# Altium PCB Parallel_CS.PcbDoc (part 3 of 3)
Units mm, origin at the board's own origin, x right, y up, seen from the top; angles counter-clockwise.
Board outline 81.03 x 171.07 mm, 4 copper layers (Top Layer, Ground Plane, Power Plane, Bottom Layer), stack 0.778 mm thick; 393 components, 189 nets, 1068 pads, 234 vias.
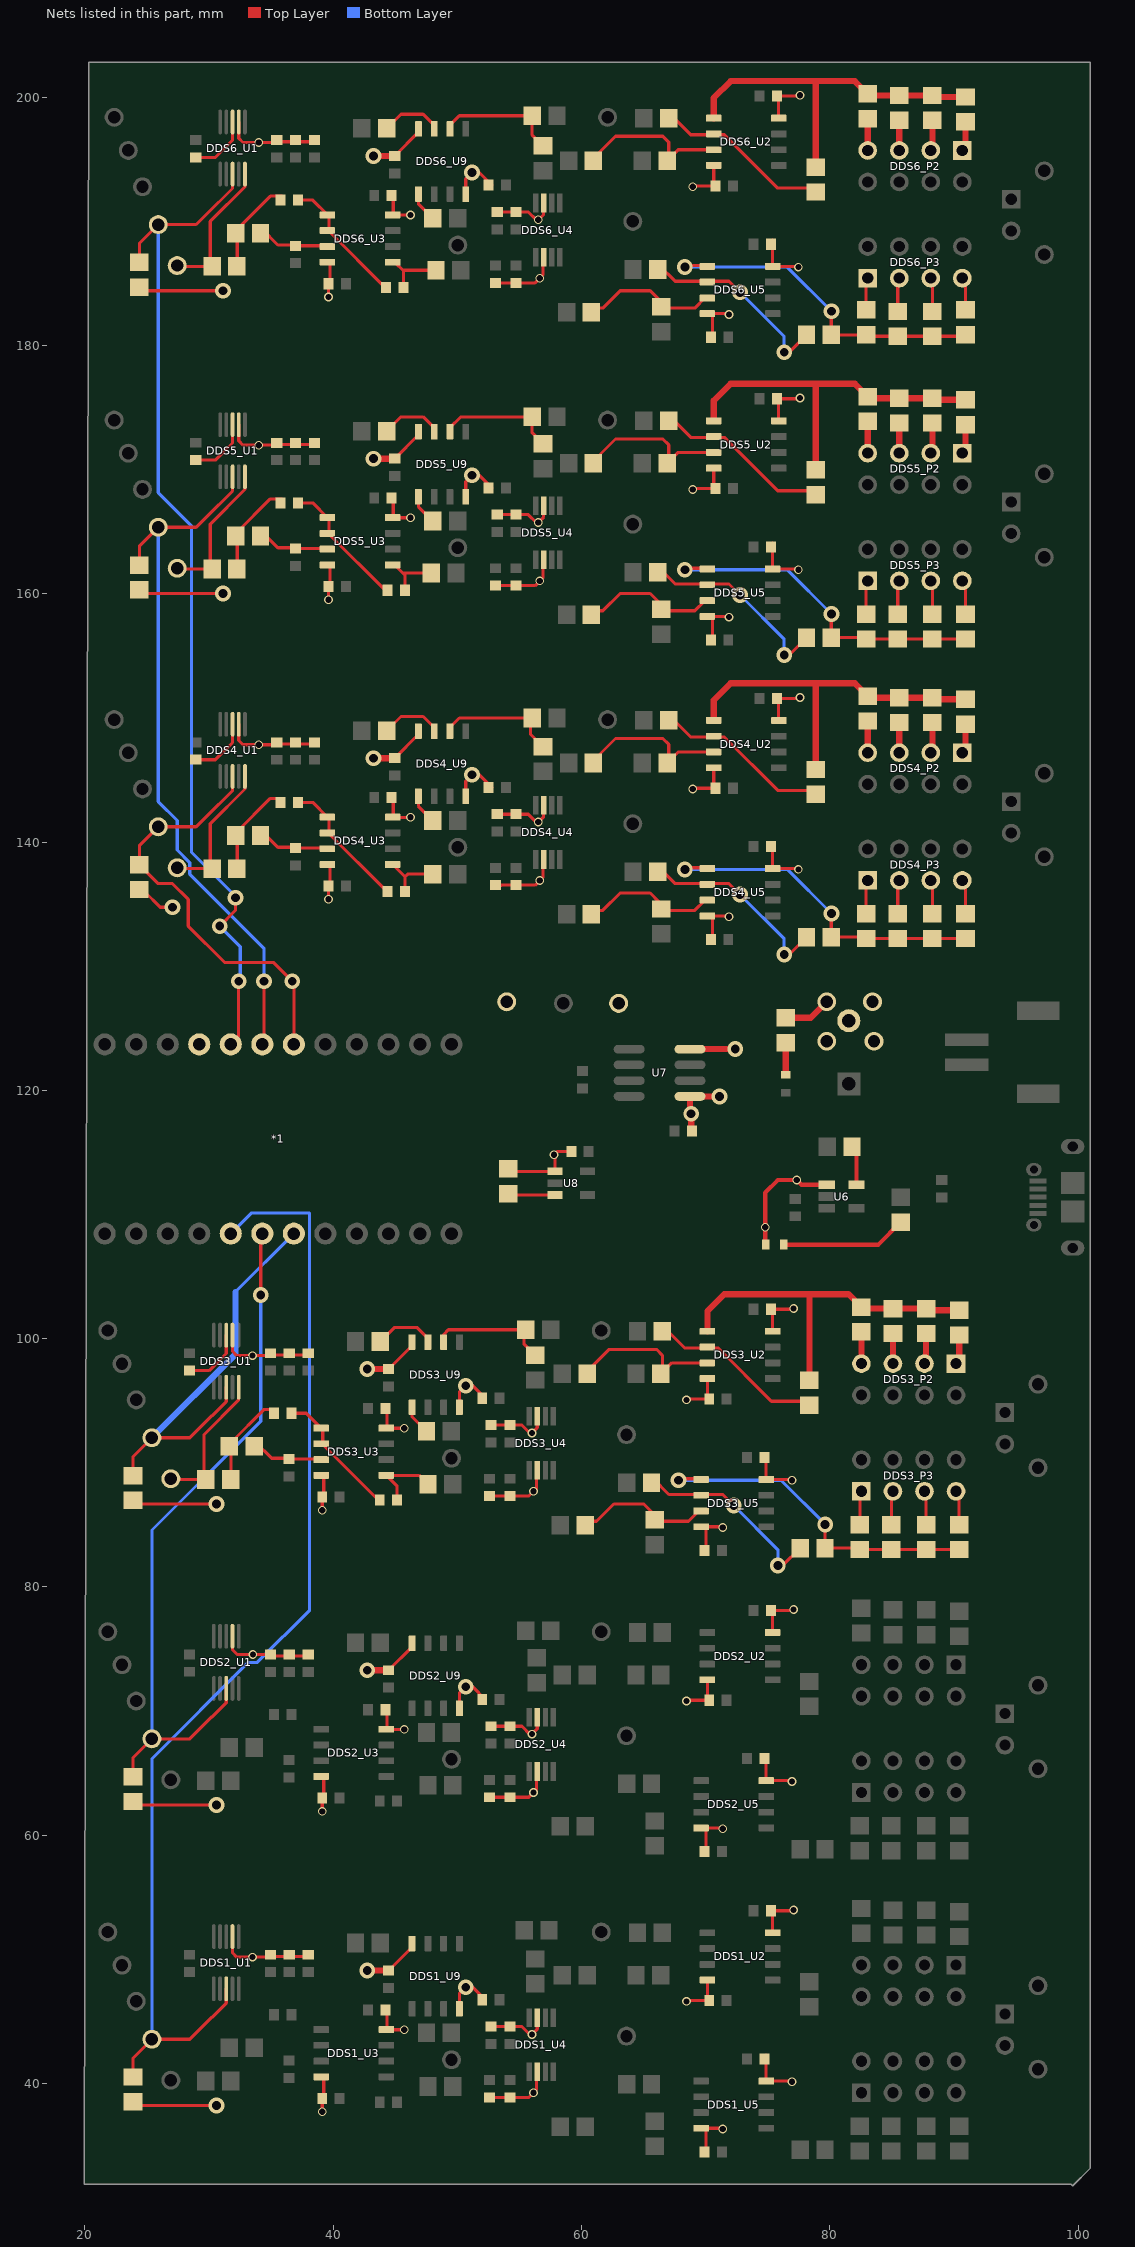
[diagram p5: the nets of this part, all layers, seen from the top]

## Via types
v1: diameter 0.7, hole 0.5, Top Layer to Bottom Layer, 143 vias
v2: diameter 1.27, hole 0.711, Top Layer to Bottom Layer, 76 vias
v3: diameter 1.27, hole 0.711, Top Layer to Bottom Layer, tented both sides, 9 vias
v4: diameter 1.5, hole 1, Top Layer to Bottom Layer, 6 vias

## Nets (pads, with @x,y where several pads share a name; then routed paths per layer and width w, separated by ;. In a path a pad name is that pad's centre, name@x,y a point inside that pad or via, vN(x,y) a via of type N, cw(c..) or ccw(c..) an arc to the next point about the centre after c; other vN are vias at no path point) (continued)
NetDDS3_C1_2: DDS3_C1.2 DDS3_R5.2 DDS3_U3.3 | length 5.7
  Top Layer w0.254: DDS3_R5.2@33.766,91.632 35.036,90.362 DDS3_C1.2@36.319,90.362 ; DDS3_C1.2@36.449,90.3 38.982,90.3 DDS3_U3.3@39.031,90.251
NetDDS3_C2_1: DDS3_C2.1 DDS3_C3.1 DDS3_U3.1 DDS3_U3.2 | length 10.6
  Top Layer w0.254: DDS3_C3.1@36.641,93.98 37.842,93.98 DDS3_U3.1@39.031,92.791 ; DDS3_U3.1@39.158,92.775 39.158,91.463 DDS3_C2.1@43.688,86.933
NetDDS3_C2_2: DDS3_C2.2 DDS3_R6.2 DDS3_U3.5 | length 6
  Top Layer w0.254: DDS3_C2.2@45.15,86.995 45.15,88.112 DDS3_U3.5@44.281,88.981 46.925,88.981 DDS3_R6.2@47.641,88.265
NetDDS3_C3_2: DDS3_C3.2 DDS3_R4.2 DDS3_R5.1 | length 7.4
  Top Layer w0.254: DDS3_R4.2@31.861,88.965 31.766,89.06 31.766,91.632 34.433,94.299 DDS3_C3.2@35.368,94.299
NetDDS3_C4_2: DDS3_C4.2 DDS3_U1.3 | length 5
  Top Layer w0.254: DDS3_C4.2@28.418,97.418 30.004,97.418 31.385,98.799 DDS3_U1.3@31.385,100.277
NetDDS3_P2_1: DDS3_P2.1 DDS3_R19.2 | length 2.4
  Top Layer w0.5: DDS3_P2.1@90.17,97.982 90.424,98.236 DDS3_R19.2@90.424,100.284
NetDDS3_P2_3: DDS3_P2.3 DDS3_R18.2 | length 2.5
  Top Layer w0.5: DDS3_P2.3@87.63,97.982 87.757,98.109 DDS3_R18.2@87.757,100.411
NetDDS3_P2_5: DDS3_P2.5 DDS3_R11.2 | length 2.5
  Top Layer w0.5: DDS3_P2.5@85.09,97.982 84.963,98.109 85.09,98.236 DDS3_R11.2@85.09,100.411
NetDDS3_P2_7: DDS3_P2.7 DDS3_R3.1 | length 2.4
  Top Layer w0.5: DDS3_P2.7@82.36,98.172 82.55,98.363 DDS3_R3.1@82.55,100.538
NetDDS3_P3_1: DDS3_P3.1 DDS3_R23.1 | length 2.7
  Top Layer w0.254: DDS3_R23.1@82.423,85.012 82.423,87.568 DDS3_P3.1@82.55,87.695
NetDDS3_P3_3: DDS3_P3.3 DDS3_R22.2 | length 2.7
  Top Layer w0.254: DDS3_R22.2@84.963,85.012 DDS3_P3.3@84.963,87.568
  Top Layer w0.5: DDS3_P3.3@84.963,87.568 DDS3_P3.3@85.09,87.695
NetDDS3_P3_5: DDS3_P3.5 DDS3_R21.2 | length 2.7
  Top Layer w0.254: DDS3_P3.5@87.63,87.695 87.757,87.568 DDS3_R21.2@87.757,85.012
NetDDS3_P3_7: DDS3_P3.7 DDS3_R20.2 | length 2.8
  Top Layer w0.254: DDS3_P3.7@90.17,87.695 90.424,87.441 DDS3_R20.2@90.424,85.012
NetDDS3_R1_2: DDS3_R1.2 DDS3_R2.1 DDS3_U2.2 | length 14.3
  Top Layer w0.254: DDS3_R1.2@66.643,100.903 68.294,99.252 70.993,99.252 75.295,94.95 DDS3_R2.1@78.486,94.95
NetDDS3_R2_2: DDS3_R2.2 DDS3_R3.2 DDS3_R11.1 DDS3_R18.1 DDS3_R19.1 DDS3_U2.1 | length 29.9
  Top Layer w0.5: DDS3_U2.1@70.146,100.584 70.146,102.215 71.501,103.57 78.359,103.57 ; DDS3_R2.2@78.359,96.631 78.359,103.57 ; DDS3_R19.1@90.424,102.284 87.884,102.284 DDS3_R18.1@87.757,102.411 DDS3_R11.1@85.09,102.411 82.677,102.411 DDS3_R3.2@82.55,102.538 81.518,103.57 78.359,103.57
NetDDS3_R4_1: DDS3_R4.1 DDS3_TP3.1 DDS3_U1.10 | length 11.5
  Top Layer w0.254: DDS3_TP3.1@26.924,88.711 26.989,88.646 DDS3_R4.1@29.734,88.646 29.591,88.789 29.591,92.267 32.385,95.061 DDS3_U1.10@32.385,96.077
NetDDS3_R7_2: DDS3_R7.2 DDS3_R8.1 DDS3_U2.3 | length 12.1
  Top Layer w0.254: DDS3_R7.2@60.579,97.474 62.23,99.125 66.04,99.125 66.516,98.649 DDS3_R8.1@66.516,97.474 ; DDS3_R8.1@66.389,97.155 67.278,98.044 DDS3_U2.3@70.146,98.044
NetDDS3_R9_2: DDS3_R9.2 DDS3_R10.1 DDS3_U5.2 | length 16.1
  Top Layer w0.254: DDS3_R9.2@65.77,88.711 67.04,87.441 71.374,87.441 v2(72.263,86.552) ; v2(75.819,81.726) 76.216,81.726 DDS3_R10.1@77.613,83.123
  Bottom Layer w0.254: v2(72.263,86.552) 75.819,82.996 v2(75.819,81.726)
NetDDS3_R10_2: DDS3_R10.2 DDS3_R20.1 DDS3_R21.1 DDS3_R22.1 DDS3_R23.2 DDS3_U5.1 | length 28
  Top Layer w0.254: v2(67.818,88.584) 67.945,88.711 69.573,88.711 DDS3_U5.1@69.638,88.646 ; v2(79.629,85.028) 79.613,85.012 DDS3_R10.2@79.613,83.123 82.312,83.123 DDS3_R23.2@82.423,83.012 DDS3_R22.1@84.963,83.012 DDS3_R21.1@87.757,83.012 DDS3_R20.1@90.424,83.012
  Bottom Layer w0.254: v2(67.818,88.584) 76.073,88.584 v2(79.629,85.028)
NetDDS3_R12_2: DDS3_R12.2 DDS3_R13.1 DDS3_U5.3 | length 11.1
  Top Layer w0.254: DDS3_R12.2@60.42,85.282 61.214,85.282 62.611,86.679 65.024,86.679 65.754,85.949 65.754,85.282 68.622,85.282 69.446,86.106 DDS3_U5.3@69.638,86.106
NetDDS3_R25_2: DDS3_R25.2 DDS3_R26.1 DDS3_U9.2 | length 9.6
  Top Layer w0.254: DDS3_U9.2@48.895,100.014 48.895,100.33 49.276,100.711 DDS3_R25.2@55.515,100.711 55.356,100.552 55.356,99.568 DDS3_R26.1@56.261,98.663
NetDDS3_R27_1: DDS3_R27.1 DDS3_U9.3 | length 5
  Top Layer w0.254: DDS3_R27.1@43.799,99.76 43.815,99.76 44.958,100.903 46.736,100.903 47.625,100.014 DDS3_U9.3@47.625,99.718
NetDDS3_R28_1: DDS3_R28.1 DDS3_U9.5 | length 2.4
  Top Layer w0.254: DDS3_U9.5@46.355,94.468 46.355,93.68 DDS3_R28.1@47.514,92.521
NetDDS4_C1_2: DDS4_C1.2 DDS4_R5.2 DDS4_U3.3 | length 5.7
  Top Layer w0.254: DDS4_R5.2@34.274,140.843 35.544,139.573 DDS4_C1.2@36.827,139.573 ; DDS4_C1.2@36.957,139.511 39.49,139.511 DDS4_U3.3@39.539,139.462
NetDDS4_C2_1: DDS4_C2.1 DDS4_C3.1 DDS4_U3.1 DDS4_U3.2 | length 10.6
  Top Layer w0.254: DDS4_C3.1@37.149,143.191 38.35,143.191 DDS4_U3.1@39.539,142.002 ; DDS4_U3.1@39.666,141.986 39.666,140.674 DDS4_C2.1@44.196,136.144
NetDDS4_C2_2: DDS4_C2.2 DDS4_R6.2 DDS4_U3.5 | length 4.9
  Top Layer w0.254: DDS4_U3.5@44.789,138.192 45.785,137.196 ; DDS4_C2.2@45.785,136.017 45.785,137.196 ; DDS4_R6.2@48.022,137.414 46.003,137.414 45.785,137.196
NetDDS4_C3_2: DDS4_C3.2 DDS4_R4.2 DDS4_R5.1 | length 7.4
  Top Layer w0.254: DDS4_R4.2@32.369,138.176 32.274,138.271 32.274,140.843 34.941,143.51 DDS4_C3.2@35.876,143.51
NetDDS4_C4_2: DDS4_C4.2 DDS4_U1.3 | length 5
  Top Layer w0.254: DDS4_C4.2@28.926,146.629 30.512,146.629 31.893,148.01 DDS4_U1.3@31.893,149.488
NetDDS4_P2_1: DDS4_P2.1 DDS4_R19.2 | length 2.4
  Top Layer w0.5: DDS4_P2.1@90.678,147.193 90.932,147.447 DDS4_R19.2@90.932,149.495
NetDDS4_P2_3: DDS4_P2.3 DDS4_R18.2 | length 2.5
  Top Layer w0.5: DDS4_P2.3@88.138,147.193 88.265,147.32 DDS4_R18.2@88.265,149.622
NetDDS4_P2_5: DDS4_P2.5 DDS4_R11.2 | length 2.5
  Top Layer w0.5: DDS4_P2.5@85.598,147.193 85.471,147.32 85.598,147.447 DDS4_R11.2@85.598,149.622
NetDDS4_P2_7: DDS4_P2.7 DDS4_R3.1 | length 2.4
  Top Layer w0.5: DDS4_P2.7@82.867,147.383 83.058,147.574 DDS4_R3.1@83.058,149.749
NetDDS4_P3_1: DDS4_P3.1 DDS4_R23.1 | length 2.7
  Top Layer w0.254: DDS4_R23.1@82.931,134.223 82.931,136.779 DDS4_P3.1@83.058,136.906
NetDDS4_P3_3: DDS4_P3.3 DDS4_R22.2 | length 2.7
  Top Layer w0.254: DDS4_R22.2@85.471,134.223 DDS4_P3.3@85.471,136.779
  Top Layer w0.5: DDS4_P3.3@85.471,136.779 DDS4_P3.3@85.598,136.906
NetDDS4_P3_5: DDS4_P3.5 DDS4_R21.2 | length 2.7
  Top Layer w0.254: DDS4_P3.5@88.138,136.906 88.265,136.779 DDS4_R21.2@88.265,134.223
NetDDS4_P3_7: DDS4_P3.7 DDS4_R20.2 | length 2.8
  Top Layer w0.254: DDS4_P3.7@90.678,136.906 90.932,136.652 DDS4_R20.2@90.932,134.223
NetDDS4_R1_2: DDS4_R1.2 DDS4_R2.1 DDS4_U2.2 | length 14.3
  Top Layer w0.254: DDS4_R1.2@67.151,150.114 68.802,148.463 71.501,148.463 75.803,144.161 DDS4_R2.1@78.994,144.161
NetDDS4_R2_2: DDS4_R2.2 DDS4_R3.2 DDS4_R11.1 DDS4_R18.1 DDS4_R19.1 DDS4_U2.1 | length 29.9
  Top Layer w0.5: DDS4_U2.1@70.654,149.795 70.654,151.426 72.009,152.781 78.867,152.781 ; DDS4_R2.2@78.867,145.842 78.867,152.781 ; DDS4_R19.1@90.932,151.495 88.392,151.495 DDS4_R18.1@88.265,151.622 DDS4_R11.1@85.598,151.622 83.185,151.622 DDS4_R3.2@83.058,151.749 82.026,152.781 78.867,152.781
NetDDS4_R4_1: DDS4_R4.1 DDS4_TP3.1 DDS4_U1.10 | length 11.5
  Top Layer w0.254: DDS4_TP3.1@27.432,137.922 27.497,137.857 DDS4_R4.1@30.242,137.857 30.099,138 30.099,141.478 32.893,144.272 DDS4_U1.10@32.893,145.288
NetDDS4_R7_2: DDS4_R7.2 DDS4_R8.1 DDS4_U2.3 | length 12.1
  Top Layer w0.254: DDS4_R7.2@61.087,146.685 62.738,148.336 66.548,148.336 67.024,147.86 DDS4_R8.1@67.024,146.685 ; DDS4_R8.1@66.897,146.366 67.786,147.255 DDS4_U2.3@70.654,147.255
NetDDS4_R9_2: DDS4_R9.2 DDS4_R10.1 DDS4_U5.2 | length 16.1
  Top Layer w0.254: DDS4_R9.2@66.278,137.922 67.548,136.652 71.882,136.652 v2(72.771,135.763) ; v2(76.327,130.937) 76.724,130.937 DDS4_R10.1@78.121,132.334
  Bottom Layer w0.254: v2(72.771,135.763) 76.327,132.207 v2(76.327,130.937)
NetDDS4_R10_2: DDS4_R10.2 DDS4_R20.1 DDS4_R21.1 DDS4_R22.1 DDS4_R23.2 DDS4_U5.1 | length 28
  Top Layer w0.254: v2(68.326,137.795) 68.453,137.922 70.081,137.922 DDS4_U5.1@70.146,137.857 ; v2(80.137,134.239) 80.121,134.223 DDS4_R10.2@80.121,132.334 82.82,132.334 DDS4_R23.2@82.931,132.223 DDS4_R22.1@85.471,132.223 DDS4_R21.1@88.265,132.223 DDS4_R20.1@90.932,132.223
  Bottom Layer w0.254: v2(68.326,137.795) 76.581,137.795 v2(80.137,134.239)
NetDDS4_R12_2: DDS4_R12.2 DDS4_R13.1 DDS4_U5.3 | length 11.1
  Top Layer w0.254: DDS4_R12.2@60.928,134.493 61.722,134.493 63.119,135.89 65.532,135.89 66.262,135.16 66.262,134.493 69.13,134.493 69.954,135.317 DDS4_U5.3@70.146,135.317
NetDDS4_R25_2: DDS4_R25.2 DDS4_R26.1 DDS4_U9.2 | length 10
  Top Layer w0.254: DDS4_U9.2@49.403,148.929 49.403,149.225 50.165,149.987 DDS4_R25.2@56.023,149.987 55.88,149.844 55.88,148.701 DDS4_R26.1@56.896,147.685
NetDDS4_R27_1: DDS4_R27.1 DDS4_U9.3 | length 5
  Top Layer w0.254: DDS4_R27.1@44.307,148.971 44.323,148.971 45.466,150.114 47.244,150.114 48.133,149.225 DDS4_U9.3@48.133,148.929
NetDDS4_R28_1: DDS4_R28.1 DDS4_U9.5 | length 2.4
  Top Layer w0.254: DDS4_U9.5@46.863,143.679 46.863,142.891 DDS4_R28.1@48.022,141.732
NetDDS5_C1_2: DDS5_C1.2 DDS5_R5.2 DDS5_U3.3 | length 5.7
  Top Layer w0.254: DDS5_R5.2@34.274,164.973 35.544,163.703 DDS5_C1.2@36.827,163.703 ; DDS5_C1.2@36.957,163.641 39.49,163.641 DDS5_U3.3@39.539,163.592
NetDDS5_C2_1: DDS5_C2.1 DDS5_C3.1 DDS5_U3.1 DDS5_U3.2 | length 10.6
  Top Layer w0.254: DDS5_C3.1@37.149,167.321 38.35,167.321 DDS5_U3.1@39.539,166.132 ; DDS5_U3.1@39.666,166.116 39.666,164.804 DDS5_C2.1@44.196,160.274
NetDDS5_C2_2: DDS5_C2.2 DDS5_R6.2 DDS5_U3.5 | length 4.7
  Top Layer w0.254: DDS5_U3.5@44.958,162.322 45.609,161.671 ; DDS5_C2.2@45.785,160.274 45.785,161.495 45.609,161.671 ; DDS5_R6.2@47.895,161.671 45.609,161.671
NetDDS5_C3_2: DDS5_C3.2 DDS5_R4.2 DDS5_R5.1 | length 7.4
  Top Layer w0.254: DDS5_R4.2@32.369,162.306 32.274,162.401 32.274,164.973 34.941,167.64 DDS5_C3.2@35.876,167.64
NetDDS5_C4_2: DDS5_C4.2 DDS5_U1.3 | length 5
  Top Layer w0.254: DDS5_C4.2@28.926,170.759 30.512,170.759 31.893,172.14 DDS5_U1.3@31.893,173.618
NetDDS5_P2_1: DDS5_P2.1 DDS5_R19.2 | length 2.4
  Top Layer w0.5: DDS5_P2.1@90.678,171.323 90.932,171.577 DDS5_R19.2@90.932,173.625
NetDDS5_P2_3: DDS5_P2.3 DDS5_R18.2 | length 2.5
  Top Layer w0.5: DDS5_P2.3@88.138,171.323 88.265,171.45 DDS5_R18.2@88.265,173.752
NetDDS5_P2_5: DDS5_P2.5 DDS5_R11.2 | length 2.5
  Top Layer w0.5: DDS5_P2.5@85.598,171.323 85.471,171.45 85.598,171.577 DDS5_R11.2@85.598,173.752
NetDDS5_P2_7: DDS5_P2.7 DDS5_R3.1 | length 2.4
  Top Layer w0.5: DDS5_P2.7@82.867,171.513 83.058,171.704 DDS5_R3.1@83.058,173.879
NetDDS5_P3_1: DDS5_P3.1 DDS5_R23.1 | length 2.7
  Top Layer w0.254: DDS5_R23.1@82.931,158.353 82.931,160.909 DDS5_P3.1@83.058,161.036
NetDDS5_P3_3: DDS5_P3.3 DDS5_R22.2 | length 2.7
  Top Layer w0.254: DDS5_R22.2@85.471,158.353 DDS5_P3.3@85.471,160.909
  Top Layer w0.5: DDS5_P3.3@85.471,160.909 DDS5_P3.3@85.598,161.036
NetDDS5_P3_5: DDS5_P3.5 DDS5_R21.2 | length 2.7
  Top Layer w0.254: DDS5_P3.5@88.138,161.036 88.265,160.909 DDS5_R21.2@88.265,158.353
NetDDS5_P3_7: DDS5_P3.7 DDS5_R20.2 | length 2.8
  Top Layer w0.254: DDS5_P3.7@90.678,161.036 90.932,160.782 DDS5_R20.2@90.932,158.353
NetDDS5_R1_2: DDS5_R1.2 DDS5_R2.1 DDS5_U2.2 | length 14.3
  Top Layer w0.254: DDS5_R1.2@67.151,174.244 68.802,172.593 71.501,172.593 75.803,168.291 DDS5_R2.1@78.994,168.291
NetDDS5_R2_2: DDS5_R2.2 DDS5_R3.2 DDS5_R11.1 DDS5_R18.1 DDS5_R19.1 DDS5_U2.1 | length 29.9
  Top Layer w0.5: DDS5_U2.1@70.654,173.925 70.654,175.556 72.009,176.911 78.867,176.911 ; DDS5_R2.2@78.867,169.972 78.867,176.911 ; DDS5_R19.1@90.932,175.625 88.392,175.625 DDS5_R18.1@88.265,175.752 DDS5_R11.1@85.598,175.752 83.185,175.752 DDS5_R3.2@83.058,175.879 82.026,176.911 78.867,176.911
NetDDS5_R4_1: DDS5_R4.1 DDS5_TP3.1 DDS5_U1.10 | length 11.5
  Top Layer w0.254: DDS5_TP3.1@27.432,162.052 27.497,161.987 DDS5_R4.1@30.242,161.987 30.099,162.13 30.099,165.608 32.893,168.402 DDS5_U1.10@32.893,169.418
NetDDS5_R7_2: DDS5_R7.2 DDS5_R8.1 DDS5_U2.3 | length 12.1
  Top Layer w0.254: DDS5_R7.2@61.087,170.815 62.738,172.466 66.548,172.466 67.024,171.99 DDS5_R8.1@67.024,170.815 ; DDS5_R8.1@66.897,170.496 67.786,171.385 DDS5_U2.3@70.654,171.385
NetDDS5_R9_2: DDS5_R9.2 DDS5_R10.1 DDS5_U5.2 | length 16.1
  Top Layer w0.254: DDS5_R9.2@66.278,162.052 67.548,160.782 71.882,160.782 v2(72.771,159.893) ; v2(76.327,155.067) 76.724,155.067 DDS5_R10.1@78.121,156.464
  Bottom Layer w0.254: v2(72.771,159.893) 76.327,156.337 v2(76.327,155.067)
NetDDS5_R10_2: DDS5_R10.2 DDS5_R20.1 DDS5_R21.1 DDS5_R22.1 DDS5_R23.2 DDS5_U5.1 | length 28
  Top Layer w0.254: v2(68.326,161.925) 68.453,162.052 70.081,162.052 DDS5_U5.1@70.146,161.987 ; v2(80.137,158.369) 80.121,158.353 DDS5_R10.2@80.121,156.464 82.82,156.464 DDS5_R23.2@82.931,156.353 DDS5_R22.1@85.471,156.353 DDS5_R21.1@88.265,156.353 DDS5_R20.1@90.932,156.353
  Bottom Layer w0.254: v2(68.326,161.925) 76.581,161.925 v2(80.137,158.369)
NetDDS5_R12_2: DDS5_R12.2 DDS5_R13.1 DDS5_U5.3 | length 11.1
  Top Layer w0.254: DDS5_R12.2@60.928,158.623 61.722,158.623 63.119,160.02 65.532,160.02 66.262,159.29 66.262,158.623 69.13,158.623 69.954,159.447 DDS5_U5.3@70.146,159.447
NetDDS5_R25_2: DDS5_R25.2 DDS5_R26.1 DDS5_U9.2 | length 9.8
  Top Layer w0.254: DDS5_U9.2@49.403,173.059 49.403,173.355 50.292,174.244 DDS5_R25.2@56.023,174.244 56.023,172.958 56.896,172.085 DDS5_R26.1@56.896,172.069
NetDDS5_R27_1: DDS5_R27.1 DDS5_U9.3 | length 5
  Top Layer w0.254: DDS5_R27.1@44.307,173.101 44.323,173.101 45.466,174.244 47.244,174.244 48.133,173.355 DDS5_U9.3@48.133,173.059
NetDDS5_R28_1: DDS5_R28.1 DDS5_U9.5 | length 2.4
  Top Layer w0.254: DDS5_U9.5@46.863,167.809 46.863,167.021 DDS5_R28.1@48.022,165.862
NetDDS6_C1_2: DDS6_C1.2 DDS6_R5.2 DDS6_U3.3 | length 5.7
  Top Layer w0.254: DDS6_R5.2@34.274,189.357 35.544,188.087 DDS6_C1.2@36.827,188.087 ; DDS6_C1.2@36.957,188.025 39.49,188.025 DDS6_U3.3@39.539,187.976
NetDDS6_C2_1: DDS6_C2.1 DDS6_C3.1 DDS6_U3.1 DDS6_U3.2 | length 10.6
  Top Layer w0.254: DDS6_C3.1@37.149,191.705 38.35,191.705 DDS6_U3.1@39.539,190.516 ; DDS6_U3.1@39.666,190.5 39.666,189.188 DDS6_C2.1@44.196,184.658
NetDDS6_C2_2: DDS6_C2.2 DDS6_R6.2 DDS6_U3.5 | length 5
  Top Layer w0.254: DDS6_U3.5@44.958,186.706 45.658,186.006 ; DDS6_C2.2@45.658,184.658 45.658,186.006 ; DDS6_R6.2@48.276,186.055 45.707,186.055 45.658,186.006
NetDDS6_C3_2: DDS6_C3.2 DDS6_R4.2 DDS6_R5.1 | length 7.4
  Top Layer w0.254: DDS6_R4.2@32.369,186.69 32.274,186.785 32.274,189.357 34.941,192.024 DDS6_C3.2@35.876,192.024
NetDDS6_C4_2: DDS6_C4.2 DDS6_U1.3 | length 5
  Top Layer w0.254: DDS6_C4.2@28.926,195.143 30.512,195.143 31.893,196.524 DDS6_U1.3@31.893,198.002
NetDDS6_P2_1: DDS6_P2.1 DDS6_R19.2 | length 2.4
  Top Layer w0.5: DDS6_P2.1@90.678,195.707 90.932,195.961 DDS6_R19.2@90.932,198.009
NetDDS6_P2_3: DDS6_P2.3 DDS6_R18.2 | length 2.5
  Top Layer w0.5: DDS6_P2.3@88.138,195.707 88.265,195.834 DDS6_R18.2@88.265,198.136
NetDDS6_P2_5: DDS6_P2.5 DDS6_R11.2 | length 2.5
  Top Layer w0.5: DDS6_P2.5@85.598,195.707 85.471,195.834 85.598,195.961 DDS6_R11.2@85.598,198.136
NetDDS6_P2_7: DDS6_P2.7 DDS6_R3.1 | length 2.4
  Top Layer w0.5: DDS6_P2.7@82.867,195.897 83.058,196.088 DDS6_R3.1@83.058,198.263
NetDDS6_P3_1: DDS6_P3.1 DDS6_R23.1 | length 2.7
  Top Layer w0.254: DDS6_R23.1@82.931,182.737 DDS6_R23.1@82.931,182.864 82.931,185.293 DDS6_P3.1@83.058,185.42
NetDDS6_P3_3: DDS6_P3.3 DDS6_R22.2 | length 2.7
  Top Layer w0.254: DDS6_R22.2@85.471,182.737 DDS6_P3.3@85.471,185.293
  Top Layer w0.5: DDS6_P3.3@85.471,185.293 DDS6_P3.3@85.598,185.42
NetDDS6_P3_5: DDS6_P3.5 DDS6_R21.2 | length 2.7
  Top Layer w0.254: DDS6_P3.5@88.138,185.42 88.265,185.293 DDS6_R21.2@88.265,182.737
NetDDS6_P3_7: DDS6_P3.7 DDS6_R20.2 | length 2.8
  Top Layer w0.254: DDS6_P3.7@90.678,185.42 90.932,185.166 DDS6_R20.2@90.932,182.864 DDS6_R20.2@90.932,182.737
NetDDS6_R1_2: DDS6_R1.2 DDS6_R2.1 DDS6_U2.2 | length 14.3
  Top Layer w0.254: DDS6_R1.2@67.151,198.628 68.802,196.977 71.501,196.977 75.803,192.675 DDS6_R2.1@78.994,192.675
NetDDS6_R2_2: DDS6_R2.2 DDS6_R3.2 DDS6_R11.1 DDS6_R18.1 DDS6_R19.1 DDS6_U2.1 | length 29.9
  Top Layer w0.5: DDS6_U2.1@70.654,198.309 70.654,199.94 72.009,201.295 78.867,201.295 ; DDS6_R2.2@78.867,194.356 78.867,201.295 ; DDS6_R19.1@90.932,200.009 88.392,200.009 DDS6_R18.1@88.265,200.136 DDS6_R11.1@85.598,200.136 83.185,200.136 DDS6_R3.2@83.058,200.263 82.026,201.295 78.867,201.295
NetDDS6_R4_1: DDS6_R4.1 DDS6_TP3.1 DDS6_U1.10 | length 11.5
  Top Layer w0.254: DDS6_TP3.1@27.432,186.436 27.497,186.371 DDS6_R4.1@30.242,186.371 30.099,186.514 30.099,189.992 32.893,192.786 DDS6_U1.10@32.893,193.802
NetDDS6_R7_2: DDS6_R7.2 DDS6_R8.1 DDS6_U2.3 | length 12.1
  Top Layer w0.254: DDS6_R7.2@61.087,195.199 62.738,196.85 66.548,196.85 67.024,196.374 DDS6_R8.1@67.024,195.199 ; DDS6_R8.1@66.897,194.88 67.786,195.769 DDS6_U2.3@70.654,195.769
NetDDS6_R9_2: DDS6_R9.2 DDS6_R10.1 DDS6_U5.2 | length 16.1
  Top Layer w0.254: DDS6_R9.2@66.278,186.436 67.548,185.166 71.882,185.166 v2(72.771,184.277) ; v2(76.327,179.451) 76.724,179.451 DDS6_R10.1@78.121,180.848
  Bottom Layer w0.254: v2(72.771,184.277) 76.327,180.721 v2(76.327,179.451)
NetDDS6_R10_2: DDS6_R10.2 DDS6_R20.1 DDS6_R21.1 DDS6_R22.1 DDS6_R23.2 DDS6_U5.1 | length 28
  Top Layer w0.254: v2(68.326,186.309) 68.453,186.436 70.081,186.436 DDS6_U5.1@70.146,186.371 ; v2(80.137,182.753) 80.121,182.737 DDS6_R10.2@80.121,180.848 82.82,180.848 82.931,180.737 DDS6_R22.1@85.471,180.737 DDS6_R21.1@88.265,180.737 DDS6_R20.1@90.932,180.737
  Bottom Layer w0.254: v2(68.326,186.309) 76.581,186.309 v2(80.137,182.753)
NetDDS6_R12_2: DDS6_R12.2 DDS6_R13.1 DDS6_U5.3 | length 11.1
  Top Layer w0.254: DDS6_R12.2@60.928,183.007 61.722,183.007 63.119,184.404 65.532,184.404 66.262,183.674 66.262,183.007 69.13,183.007 69.954,183.831 DDS6_U5.3@70.146,183.831
NetDDS6_R25_2: DDS6_R25.2 DDS6_R26.1 DDS6_U9.2 | length 10
  Top Layer w0.254: DDS6_U9.2@49.403,197.443 49.403,197.739 50.165,198.501 DDS6_R25.2@56.023,198.501 56.023,196.945 DDS6_R26.1@56.896,196.072
NetDDS6_R27_1: DDS6_R27.1 DDS6_U9.3 | length 5
  Top Layer w0.254: DDS6_R27.1@44.307,197.485 44.323,197.485 45.466,198.628 47.244,198.628 48.133,197.739 DDS6_U9.3@48.133,197.443
NetDDS6_R28_1: DDS6_R28.1 DDS6_U9.5 | length 2.4
  Top Layer w0.254: DDS6_U9.5@46.863,192.193 46.863,191.405 DDS6_R28.1@48.022,190.246
NetDS1_1: DS1.1 R16.1 | length 10.2
  Top Layer w0.35: DS1.1@76.29,107.569 83.915,107.569 R16.1@85.725,109.379
NetDS1_2: DS1.2 U6.1 | length 9.7
  Top Layer w0.35: DS1.2@74.84,107.569 74.803,107.606 v1(74.803,108.966) 74.803,111.76 75.819,112.776 v1(77.343,112.776) 77.729,112.39 U6.1@79.756,112.39
NetDS2_1: DS2.1 R15.1 | length 2.6
  Top Layer w0.5: DS2.1@76.454,121.248 R15.1@76.454,123.841
NetR14_2: R14.2 U6.5 | length 3.2
  Top Layer w0.35: R14.2@81.788,115.443 82.156,115.075 U6.5@82.156,112.39
NetR17_2: R17.2 U8.3 | length 3.8
  Top Layer w0.254: R17.2@54.102,111.665 54.195,111.572 U8.3@57.872,111.572
SPI_FSYNC1: *1.5 DDS1_R24.1 DDS1_TP1.1 DDS1_U1.8 | length 91.3
  Top Layer w0.254: DDS1_R24.1@23.876,40.513 23.876,42.037 DDS1_TP1.1@25.4,43.561 28.448,43.561 30.228,45.341 30.256,45.341 31.385,46.47 DDS1_U1.8@31.385,47.625
  Bottom Layer w0.254: DDS1_TP1.1@25.4,43.561 25.4,66.167 33.147,73.914 33.894,73.914 38.1,78.12 38.1,110.109 33.401,110.109 *1.5@31.75,108.458
SPI_FSYNC2: *1.6 DDS2_R24.1 DDS2_TP1.1 DDS2_U1.8 | length 56.4
  Top Layer w0.254: DDS2_R24.1@23.876,64.708 23.876,66.232 DDS2_TP1.1@25.4,67.756 28.448,67.756 30.228,69.536 30.256,69.536 31.385,70.665 DDS2_U1.8@31.385,71.82 ; v3(34.163,103.505) 34.163,108.331 *1.6@34.29,108.458
  Bottom Layer w0.254: DDS2_TP1.1@25.4,67.756 25.4,84.582 34.163,93.345 v3(34.163,103.505)
SPI_FSYNC3: *1.7 DDS3_R24.1 DDS3_TP1.1 DDS3_U1.8 | length 33.2
  Top Layer w0.254: DDS3_R24.1@23.876,88.965 23.876,90.489 DDS3_TP1.1@25.4,92.013 28.448,92.013 30.228,93.793 30.256,93.793 31.385,94.922 DDS3_U1.8@31.385,96.077
  Bottom Layer w0.254: 32.131,103.759 *1.7@36.83,108.458
  Bottom Layer w0.5: DDS3_TP1.1@25.4,92.013 32.131,98.744 32.131,103.759
SPI_FSYNC4: *1.19 DDS4_R24.1 DDS4_TP1.1 DDS4_U1.8 | length 34.6
  Top Layer w0.254: DDS4_U1.8@31.893,145.288 31.893,144.133 30.764,143.004 30.736,143.004 28.956,141.224 DDS4_TP1.1@25.908,141.224 24.384,139.7 DDS4_R24.1@24.384,138.176 25.908,136.652 27.051,136.652 28.321,135.382 28.321,133.223 31.242,130.302 35.179,130.302 v3(36.703,128.778) 36.83,128.651 *1.19@36.83,123.698
SPI_FSYNC5: *1.18 DDS5_R24.1 DDS5_TP1.1 DDS5_U1.8 | length 57.3
  Top Layer w0.254: DDS5_R24.1@24.384,162.306 24.384,163.83 DDS5_TP1.1@25.908,165.354 28.956,165.354 30.736,167.134 30.764,167.134 31.893,168.263 DDS5_U1.8@31.893,169.418 ; *1.18@34.29,123.698 34.417,123.825 v3(34.417,128.778)
  Bottom Layer w0.254: DDS5_TP1.1@25.908,165.354 25.908,143.256 27.432,141.732 27.432,139.356 28.446,138.342 28.446,137.416 34.417,131.445 v3(34.417,128.778)
SPI_FSYNC6: *1.17 DDS6_R24.1 DDS6_TP1.1 DDS6_U1.8 | length 82.2
  Top Layer w0.254: DDS6_R24.1@24.384,186.69 24.384,188.214 DDS6_TP1.1@25.908,189.738 28.956,189.738 30.736,191.518 30.764,191.518 31.893,192.647 DDS6_U1.8@31.893,193.802 ; v3(30.861,133.223) 32.131,134.493 v3(32.131,135.509) ; *1.17@31.75,123.698 32.385,124.333 v3(32.385,128.778)
  Bottom Layer w0.254: DDS6_TP1.1@25.908,189.738 25.908,168.148 28.575,165.481 28.575,139.192 32.131,135.636 v3(32.131,135.509) ; v3(30.861,133.223) 32.512,131.572 32.512,128.905 v3(32.385,128.778)
V+: *1.16 C22.2 DDS1_C5.2 DDS1_C7.2 DDS1_C9.2 DDS1_C11.2 DDS1_C12.2 DDS1_C13.2 DDS1_C14.2 DDS1_C15.2 DDS1_C23.2 DDS1_R24.2 DDS1_U1.2 DDS1_U2.8 DDS1_U3.8 DDS1_U4.2 DDS1_U5.8 DDS1_U9.8 DDS2_C5.2 DDS2_C7.2 DDS2_C9.2 DDS2_C11.2 DDS2_C12.2 DDS2_C13.2 DDS2_C14.2 DDS2_C15.2 DDS2_C23.2 DDS2_R24.2 DDS2_U1.2 DDS2_U2.8 DDS2_U3.8 DDS2_U4.2 DDS2_U5.8 DDS2_U9.8 DDS3_C5.2 DDS3_C7.2 DDS3_C9.2 DDS3_C11.2 DDS3_C12.2 DDS3_C13.2 DDS3_C14.2 DDS3_C15.2 DDS3_C23.2 DDS3_R24.2 DDS3_U1.2 DDS3_U2.8 DDS3_U3.8 DDS3_U4.2 DDS3_U5.8 DDS3_U9.8 DDS4_C5.2 DDS4_C7.2 DDS4_C9.2 DDS4_C11.2 DDS4_C12.2 DDS4_C13.2 DDS4_C14.2 DDS4_C15.2 DDS4_C23.2 DDS4_R24.2 DDS4_U1.2 DDS4_U2.8 DDS4_U3.8 DDS4_U4.2 DDS4_U5.8 DDS4_U9.8 DDS5_C5.2 DDS5_C7.2 DDS5_C9.2 DDS5_C11.2 DDS5_C12.2 DDS5_C13.2 DDS5_C14.2 DDS5_C15.2 DDS5_C23.2 DDS5_R24.2 DDS5_U1.2 DDS5_U2.8 DDS5_U3.8 DDS5_U4.2 DDS5_U5.8 DDS5_U9.8 DDS6_C5.2 DDS6_C7.2 DDS6_C9.2 DDS6_C11.2 DDS6_C12.2 DDS6_C13.2 DDS6_C14.2 DDS6_C15.2 DDS6_C23.2 DDS6_R24.2 DDS6_U1.2 DDS6_U2.8 DDS6_U3.8 DDS6_U4.2 DDS6_U5.8 DDS6_U9.8 R15.2 R17.1 S1.2 TP11.1 U7.8 U8.1 | length 223.9
  Top Layer w0.254: DDS1_R24.2@23.876,38.513 24.162,38.227 v2(30.607,38.227) ; DDS2_R24.2@23.876,62.708 24.162,62.422 v2(30.607,62.422) ; DDS3_R24.2@23.876,86.965 24.162,86.679 v2(30.607,86.679) ; DDS4_R24.2@24.384,136.176 24.67,135.89 24.797,136.017 26.067,134.747 v2(27.051,134.747) ; DDS5_R24.2@24.384,160.306 24.67,160.02 v2(31.115,160.02) ; DDS6_R24.2@24.384,184.69 24.67,184.404 v2(31.115,184.404) ; DDS1_U1.2@31.885,51.825 31.885,50.517 32.228,50.174 v1(33.498,50.174) 35.198,50.174 35.26,50.236 DDS1_C13.2@38.308,50.236 ; DDS2_U1.2@31.885,76.02 31.885,74.922 32.258,74.549 v1(33.528,74.549) 35.018,74.549 35.198,74.369 35.26,74.431 DDS2_C13.2@38.308,74.431 ; DDS3_U1.2@31.885,100.277 31.885,98.969 32.228,98.626 v1(33.498,98.626) 35.198,98.626 35.26,98.688 DDS3_C13.2@38.308,98.688 ; DDS4_U1.2@32.393,149.488 32.393,148.18 32.736,147.837 v1(34.006,147.837) 35.706,147.837 35.768,147.899 DDS4_C13.2@38.816,147.899 ; DDS5_U1.2@32.393,173.618 32.393,172.31 32.736,171.967 v1(34.006,171.967) 35.706,171.967 35.768,172.029 DDS5_C13.2@38.816,172.029 ; DDS6_U1.2@32.393,198.002 32.393,196.694 32.736,196.351 v1(34.006,196.351) 35.706,196.351 35.768,196.413 DDS6_C13.2@38.816,196.413 ; DDS1_C5.2@44.199,45.909 44.326,45.909 DDS1_U3.8@44.326,44.339 ; DDS2_C5.2@44.199,70.104 44.326,70.104 DDS2_U3.8@44.326,68.534 ; DDS3_C5.2@44.199,94.361 44.326,94.361 DDS3_U3.8@44.326,92.791 ; DDS1_U3.8@44.281,44.339 44.297,44.323 v1(45.72,44.323) ; DDS2_U3.8@44.281,68.534 44.297,68.518 v1(45.72,68.518) ; DDS3_U3.8@44.281,92.791 44.297,92.775 v1(45.72,92.775) ; DDS4_C5.2@44.707,143.572 44.834,143.572 DDS4_U3.8@44.834,142.002 ; DDS5_C5.2@44.707,167.702 44.834,167.702 DDS5_U3.8@44.834,166.132 ; DDS6_C5.2@44.707,192.086 44.834,192.086 DDS6_U3.8@44.834,190.516 ; DDS4_U3.8@44.789,142.002 44.805,141.986 v1(46.228,141.986) ; DDS5_U3.8@44.789,166.132 44.805,166.116 v1(46.228,166.116) ; DDS6_U3.8@44.789,190.516 44.805,190.5 v1(46.228,190.5) ; DDS1_U9.8@50.165,46.016 50.165,47.244 v2(50.673,47.752) 51.243,47.752 DDS1_C23.2@52.259,46.736 ; DDS2_U9.8@50.165,70.211 50.165,71.439 v2(50.673,71.947) 51.243,71.947 DDS2_C23.2@52.259,70.931 ; DDS3_U9.8@50.165,94.468 50.165,95.696 v2(50.673,96.204) 51.243,96.204 DDS3_C23.2@52.259,95.188 ; DDS4_U9.8@50.673,143.679 50.673,144.907 v2(51.181,145.415) 51.751,145.415 DDS4_C23.2@52.767,144.399 ; DDS5_U9.8@50.673,167.809 50.673,169.037 v2(51.181,169.545) 51.751,169.545 DDS5_C23.2@52.767,168.529 ; DDS6_U9.8@50.673,192.193 50.673,193.421 v2(51.181,193.929) 51.751,193.929 DDS6_C23.2@52.767,192.913 ; DDS1_C15.2@52.578,38.859 53.024,38.859 53.021,38.862 55.753,38.862 v1(56.134,39.243) 56.388,39.497 DDS1_U4.2@56.388,41.275 ; DDS2_C15.2@52.578,63.054 53.024,63.054 53.021,63.057 55.753,63.057 v1(56.134,63.438) 56.388,63.692 DDS2_U4.2@56.388,65.47 ; DDS3_C15.2@52.578,87.311 53.024,87.311 53.021,87.314 55.753,87.314 v1(56.134,87.695) 56.388,87.949 DDS3_U4.2@56.388,89.727 ; DDS4_C15.2@53.086,136.522 53.532,136.522 53.529,136.525 56.261,136.525 v1(56.642,136.906) 56.896,137.16 DDS4_U4.2@56.896,138.938 ; DDS5_C15.2@53.086,160.652 53.532,160.652 53.529,160.655 56.261,160.655 v1(56.642,161.036) 56.896,161.29 DDS5_U4.2@56.896,163.068 ; DDS6_C15.2@53.086,185.036 53.532,185.036 53.529,185.039 56.261,185.039 v1(56.642,185.42) 56.896,185.674 DDS6_U4.2@56.896,187.452 ; R17.1@54.102,113.665 54.295,113.472 U8.1@57.872,113.472 57.872,114.721 v1(57.785,114.808) 58.039,115.062 C22.2@59.179,115.062 ; DDS1_C9.2@74.868,42.291 74.868,40.214 DDS1_U5.8@74.888,40.194 76.9,40.194 v1(76.962,40.132) ; DDS2_C9.2@74.868,66.486 74.868,64.409 DDS2_U5.8@74.888,64.389 76.9,64.389 v1(76.962,64.327) ; DDS3_C9.2@74.868,90.743 74.868,88.666 DDS3_U5.8@74.888,88.646 76.9,88.646 v1(76.962,88.584) ; DDS1_C7.2@75.249,53.91 DDS1_C7.2@75.376,53.91 ; DDS2_C7.2@75.249,78.105 DDS2_C7.2@75.376,78.105 ; DDS3_C7.2@75.249,102.362 DDS3_C7.2@75.376,102.362 ; DDS1_U2.8@75.376,52.132 DDS1_C7.2@75.376,53.91 ; DDS2_U2.8@75.376,76.327 DDS2_C7.2@75.376,78.105 ; DDS3_U2.8@75.376,100.584 DDS3_C7.2@75.376,102.362 ; DDS4_C9.2@75.376,139.954 75.376,137.877 DDS4_U5.8@75.396,137.857 77.408,137.857 v1(77.47,137.795) ; DDS5_C9.2@75.376,164.084 75.376,162.007 DDS5_U5.8@75.396,161.987 77.408,161.987 v1(77.47,161.925) ; DDS6_C9.2@75.376,188.468 75.376,186.391 DDS6_U5.8@75.396,186.371 77.408,186.371 v1(77.47,186.309) ; DDS4_C7.2@75.757,151.573 DDS4_C7.2@75.884,151.573 ; DDS5_C7.2@75.757,175.703 DDS5_C7.2@75.884,175.703 ; DDS6_C7.2@75.757,200.087 DDS6_C7.2@75.884,200.087 ; DDS4_U2.8@75.884,149.795 DDS4_C7.2@75.884,151.573 ; DDS5_U2.8@75.884,173.925 DDS5_C7.2@75.884,175.703 ; DDS6_U2.8@75.884,198.309 DDS6_C7.2@75.884,200.087 ; v1(77.089,53.975) 77.024,53.91 DDS1_C7.2@75.376,53.91 ; v1(77.089,78.17) 77.024,78.105 DDS2_C7.2@75.376,78.105 ; v1(77.089,102.427) 77.024,102.362 DDS3_C7.2@75.376,102.362 ; v1(77.597,151.638) 77.532,151.573 DDS4_C7.2@75.884,151.573 ; v1(77.597,175.768) 77.532,175.703 DDS5_C7.2@75.884,175.703 ; v1(77.597,200.152) 77.532,200.087 DDS6_C7.2@75.884,200.087
  Top Layer w0.5: U7.8@68.744,123.317 v2(72.39,123.317) ; R15.2@76.454,125.841 78.47,125.841 v4(79.756,127.127)
  other v4: 79.756,123.952 83.566,123.952 83.439,127.127
V-: C20.2 DDS1_C6.2 DDS1_C8.2 DDS1_C10.2 DDS1_C16.2 DDS1_C17.2 DDS1_C24.2 DDS1_U2.4 DDS1_U3.4 DDS1_U4.7 DDS1_U5.4 DDS1_U9.4 DDS2_C6.2 DDS2_C8.2 DDS2_C10.2 DDS2_C16.2 DDS2_C17.2 DDS2_C24.2 DDS2_U2.4 DDS2_U3.4 DDS2_U4.7 DDS2_U5.4 DDS2_U9.4 DDS3_C6.2 DDS3_C8.2 DDS3_C10.2 DDS3_C16.2 DDS3_C17.2 DDS3_C24.2 DDS3_U2.4 DDS3_U3.4 DDS3_U4.7 DDS3_U5.4 DDS3_U9.4 DDS4_C6.2 DDS4_C8.2 DDS4_C10.2 DDS4_C16.2 DDS4_C17.2 DDS4_C24.2 DDS4_U2.4 DDS4_U3.4 DDS4_U4.7 DDS4_U5.4 DDS4_U9.4 DDS5_C6.2 DDS5_C8.2 DDS5_C10.2 DDS5_C16.2 DDS5_C17.2 DDS5_C24.2 DDS5_U2.4 DDS5_U3.4 DDS5_U4.7 DDS5_U5.4 DDS5_U9.4 DDS6_C6.2 DDS6_C8.2 DDS6_C10.2 DDS6_C16.2 DDS6_C17.2 DDS6_C24.2 DDS6_U2.4 DDS6_U3.4 DDS6_U4.7 DDS6_U5.4 DDS6_U9.4 TP12.1 U7.5 | length 121.1
  Top Layer w0.254: v1(39.116,37.719) DDS1_C6.2@39.116,38.797 ; v1(39.116,61.914) DDS2_C6.2@39.116,62.992 ; v1(39.116,86.171) DDS3_C6.2@39.116,87.249 ; DDS1_C6.2@39.243,39.116 DDS1_U3.4@39.243,40.64 ; DDS2_C6.2@39.243,63.311 DDS2_U3.4@39.243,64.835 ; DDS3_C6.2@39.243,87.568 DDS3_U3.4@39.243,89.092 ; v1(39.624,135.382) DDS4_C6.2@39.624,136.46 ; v1(39.624,159.512) DDS5_C6.2@39.624,160.59 ; v1(39.624,183.896) DDS6_C6.2@39.624,184.974 ; DDS4_C6.2@39.751,136.779 DDS4_U3.4@39.751,138.303 ; DDS5_C6.2@39.751,160.909 DDS5_U3.4@39.751,162.433 ; DDS6_C6.2@39.751,185.293 DDS6_U3.4@39.751,186.817 ; DDS1_C24.2@44.45,49.087 46.355,50.992 DDS1_U9.4@46.355,51.266 ; DDS2_C24.2@44.45,73.282 46.355,75.187 DDS2_U9.4@46.355,75.461 ; DDS3_C24.2@44.45,97.539 46.355,99.444 DDS3_U9.4@46.355,99.718 ; DDS4_C24.2@44.958,146.75 46.863,148.655 DDS4_U9.4@46.863,148.929 ; DDS5_C24.2@44.958,170.88 46.863,172.785 DDS5_U9.4@46.863,173.059 ; DDS6_C24.2@44.958,195.264 46.863,197.169 DDS6_U9.4@46.863,197.443 ; DDS1_C17.2@52.705,44.577 53.151,44.577 55.205,44.577 55.84,43.942 v1(56.007,43.942) 56.439,44.374 DDS1_U4.7@56.439,45.299 ; DDS2_C17.2@52.705,68.772 53.151,68.772 55.205,68.772 55.84,68.137 v1(56.007,68.137) 56.439,68.569 DDS2_U4.7@56.439,69.494 ; DDS3_C17.2@52.705,93.029 53.151,93.029 55.205,93.029 55.84,92.394 v1(56.007,92.394) 56.439,92.826 DDS3_U4.7@56.439,93.751 ; DDS4_C17.2@53.213,142.24 53.659,142.24 55.713,142.24 56.348,141.605 v1(56.515,141.605) 56.947,142.037 DDS4_U4.7@56.947,142.962 ; DDS5_C17.2@53.213,166.37 53.659,166.37 55.713,166.37 56.348,165.735 v1(56.515,165.735) 56.947,166.167 DDS5_U4.7@56.947,167.092 ; DDS6_C17.2@53.213,190.754 53.659,190.754 55.713,190.754 56.348,190.119 v1(56.515,190.119) 56.947,190.551 DDS6_U4.7@56.947,191.476 ; v1(68.453,46.609) 68.515,46.671 DDS1_C8.2@70.293,46.671 70.146,46.818 DDS1_U2.4@70.146,48.322 ; v1(68.453,70.804) 68.515,70.866 DDS2_C8.2@70.293,70.866 70.146,71.013 DDS2_U2.4@70.146,72.517 ; v1(68.453,95.061) 68.515,95.123 DDS3_C8.2@70.293,95.123 70.146,95.27 DDS3_U2.4@70.146,96.774 ; v1(68.961,144.272) 69.023,144.334 DDS4_C8.2@70.801,144.334 70.654,144.481 DDS4_U2.4@70.654,145.985 ; v1(68.961,168.402) 69.023,168.464 DDS5_C8.2@70.801,168.464 70.654,168.611 DDS5_U2.4@70.654,170.115 ; v1(68.961,192.786) 69.023,192.848 DDS6_C8.2@70.801,192.848 70.654,192.995 DDS6_U2.4@70.654,194.499 ; DDS1_U5.4@69.638,36.384 DDS1_U5.4@70.039,36.384 ; DDS2_U5.4@69.638,60.579 DDS2_U5.4@70.039,60.579 ; DDS3_U5.4@69.638,84.836 DDS3_U5.4@70.039,84.836 ; DDS1_C10.2@70.039,34.798 DDS1_U5.4@70.039,36.384 ; DDS2_C10.2@70.039,58.993 DDS2_U5.4@70.039,60.579 ; DDS3_C10.2@70.039,83.25 DDS3_U5.4@70.039,84.836 ; DDS4_U5.4@70.146,134.047 DDS4_U5.4@70.547,134.047 ; DDS5_U5.4@70.146,158.177 DDS5_U5.4@70.547,158.177 ; DDS6_U5.4@70.146,182.561 DDS6_U5.4@70.547,182.561 ; DDS4_C10.2@70.547,132.461 DDS4_U5.4@70.547,134.047 ; DDS5_C10.2@70.547,156.591 DDS5_U5.4@70.547,158.177 ; DDS6_C10.2@70.547,180.975 DDS6_U5.4@70.547,182.561 ; v1(71.374,36.322) 71.312,36.384 DDS1_U5.4@70.039,36.384 ; v1(71.374,60.517) 71.312,60.579 DDS2_U5.4@70.039,60.579 ; v1(71.374,84.774) 71.312,84.836 DDS3_U5.4@70.039,84.836 ; v1(71.882,133.985) 71.82,134.047 DDS4_U5.4@70.547,134.047 ; v1(71.882,158.115) 71.82,158.177 DDS5_U5.4@70.547,158.177 ; v1(71.882,182.499) 71.82,182.561 DDS6_U5.4@70.547,182.561
  Top Layer w0.5: v2(42.737,49.087) DDS1_C24.2@44.45,49.087 ; v2(42.737,73.282) DDS2_C24.2@44.45,73.282 ; v2(42.737,97.539) DDS3_C24.2@44.45,97.539 ; v2(43.245,146.75) DDS4_C24.2@44.958,146.75 ; v2(43.245,170.88) DDS5_C24.2@44.958,170.88 ; v2(43.245,195.264) DDS6_C24.2@44.958,195.264 ; C20.2@68.899,116.713 68.834,116.778 v3(68.834,118.11) 68.744,118.2 U7.5@68.744,119.507 v3(71.12,119.507)
pads on no net: *1.1 *1.2 *1.3 *1.8 *1.9 *1.10 *1.11 *1.12 *1.13 *1.15 *1.20 *1.22 *1.24 DDS1_U1.1 DDS1_U2.5 DDS1_U2.6 DDS1_U2.7 DDS1_U4.3 DDS1_U4.6 DDS1_U5.5 DDS1_U5.6 DDS1_U5.7 DDS2_U1.1 DDS2_U2.5 DDS2_U2.6 DDS2_U2.7 DDS2_U4.3 DDS2_U4.6 DDS2_U5.5 DDS2_U5.6 DDS2_U5.7 DDS3_U1.1 DDS3_U2.5 DDS3_U2.6 DDS3_U2.7 DDS3_U4.3 DDS3_U4.6 DDS3_U5.5 DDS3_U5.6 DDS3_U5.7 DDS4_U1.1 DDS4_U2.5 DDS4_U2.6 DDS4_U2.7 DDS4_U4.3 DDS4_U4.6 DDS4_U5.5 DDS4_U5.6 DDS4_U5.7 DDS5_U1.1 DDS5_U2.5 DDS5_U2.6 DDS5_U2.7 DDS5_U4.3 DDS5_U4.6 DDS5_U5.5 DDS5_U5.6 DDS5_U5.7 DDS6_U1.1 DDS6_U2.5 DDS6_U2.6 DDS6_U2.7 DDS6_U4.3 DDS6_U4.6 DDS6_U5.5 DDS6_U5.6 DDS6_U5.7 J1.2 J1.3 J1.4 J1.6 J1.7 J1.8 J1.9 J1.10 J1.11 J*1.MP1 J*1.MP2 U7.1 U7.6 U7.7
copper on no net: | length 2.1
  Top Layer w0.35: v1(98.806,117.221) 99.568,116.459 99.568,115.474

## Polygon pours and split planes (outlines as drawn)
V- on Bottom Layer "V-POUR" (solid, pour order 2): 20.447,32.199 20.574,32.326 100.965,32.326 100.457,202.125 99.187,202.125 20.574,202.125
GND on Ground Plane (split plane): 100.455,33.358 99.48,32.384 99.441,32.387 20.451,32.387 20.829,202.309 100.455,202.309
V+ on Power Plane (split plane): 100.455,33.358 99.48,32.384 99.441,32.387 20.451,32.387 20.829,202.309 100.455,202.309

## Other copper
Top Layer:
  rectangle net V+: 78.613,122.809 84.709,128.27

## Silkscreen, mask and mechanical layers (free items; w line width, h text height)
Top Overlay:
  text "CLK" at 20.955,199.517 h1.1
  text "VDIFF+" at 60.579,199.517 h1.1
  text "SDATA" at 22.987,196.85 h1.1
  text "SCLK" at 25.908,192.532 h1.1
  text "I+" at 96.901,191.643 h1.1
  text "VFILT" at 47.371,190.119 h1.1
  text "I-" at 97.028,189.103 h1.1
  text "VDIFF-" at 63.754,187.96 h1.1
  text "FSYNC" at 23.622,187.579 h1.1
  text "VDDS" at 27.051,185.039 h1.1 r270
  text "CS 6" at 93.472,180.594 h1.52
  text "CS 5" at 93.091,156.591 h1.52
  text "CS 4" at 93.345,132.969 h1.52
  text "GND" at 56.515,128.27 h1.52
  text "V-" at 49.911,126.365 h1.52
  text "V+" at 64.516,126.365 h1.52
  text "CS 3" at 93.091,83.566 h1.52
  text "CS 2" at 92.71,59.563 h1.52
  text "CS 1" at 93.218,35.052 h1.52
Bottom Overlay:
  text "UCL Parallel CS / Feb. 2018 / T. Dowrick" at 48.006,176.022 h1.4

## Text inside footprints (layer, text, board x,y; h text height)
DDS1_P2: Top Overlay "8" at 81.026,47.498 h1.27 r180; Top Overlay "7" at 81.026,50.038 h1.27 r180; Top Overlay "1" at 92.202,50.038 h1.27 r180; Top Overlay "2" at 92.71,47.498 h1.27 r180
DDS1_P3: Top Overlay "8" at 91.694,41.275 h1.27; Top Overlay "7" at 91.694,38.735 h1.27; Top Overlay "1" at 80.518,38.735 h1.27; Top Overlay "2" at 80.01,41.275 h1.27
DDS1_U4: Top Overlay "*" at 55.748,40.116 h1.88 r90; Mechanical 1 "*" at 55.747,40.114 h1.88 r90
DDS2_P2: Top Overlay "8" at 81.026,71.693 h1.27 r180; Top Overlay "7" at 81.026,74.233 h1.27 r180; Top Overlay "1" at 92.202,74.233 h1.27 r180; Top Overlay "2" at 92.71,71.693 h1.27 r180
DDS2_P3: Top Overlay "8" at 91.694,65.47 h1.27; Top Overlay "7" at 91.694,62.93 h1.27; Top Overlay "1" at 80.518,62.93 h1.27; Top Overlay "2" at 80.01,65.47 h1.27
DDS2_U4: Top Overlay "*" at 55.748,64.311 h1.88 r90; Mechanical 1 "*" at 55.747,64.309 h1.88 r90
DDS3_P2: Top Overlay "8" at 81.026,95.95 h1.27 r180; Top Overlay "7" at 81.026,98.49 h1.27 r180; Top Overlay "1" at 92.202,98.49 h1.27 r180; Top Overlay "2" at 92.71,95.95 h1.27 r180
DDS3_P3: Top Overlay "8" at 91.694,89.727 h1.27; Top Overlay "7" at 91.694,87.187 h1.27; Top Overlay "1" at 80.518,87.187 h1.27; Top Overlay "2" at 80.01,89.727 h1.27
DDS3_U4: Top Overlay "*" at 55.748,88.568 h1.88 r90; Mechanical 1 "*" at 55.747,88.566 h1.88 r90
DDS4_P2: Top Overlay "8" at 81.534,145.161 h1.27 r180; Top Overlay "7" at 81.534,147.701 h1.27 r180; Top Overlay "1" at 92.71,147.701 h1.27 r180; Top Overlay "2" at 93.218,145.161 h1.27 r180
DDS4_P3: Top Overlay "8" at 92.202,138.938 h1.27; Top Overlay "7" at 92.202,136.398 h1.27; Top Overlay "1" at 81.026,136.398 h1.27; Top Overlay "2" at 80.518,138.938 h1.27
DDS4_U4: Top Overlay "*" at 56.256,137.779 h1.88 r90; Mechanical 1 "*" at 56.255,137.777 h1.88 r90
DDS5_P2: Top Overlay "8" at 81.534,169.291 h1.27 r180; Top Overlay "7" at 81.534,171.831 h1.27 r180; Top Overlay "1" at 92.71,171.831 h1.27 r180; Top Overlay "2" at 93.218,169.291 h1.27 r180
DDS5_P3: Top Overlay "8" at 92.202,163.068 h1.27; Top Overlay "7" at 92.202,160.528 h1.27; Top Overlay "1" at 81.026,160.528 h1.27; Top Overlay "2" at 80.518,163.068 h1.27
DDS5_U4: Top Overlay "*" at 56.256,161.909 h1.88 r90; Mechanical 1 "*" at 56.255,161.907 h1.88 r90
DDS6_P2: Top Overlay "2" at 93.218,193.675 h1.27 r180; Top Overlay "1" at 92.71,196.215 h1.27 r180; Top Overlay "7" at 81.534,196.215 h1.27 r180; Top Overlay "8" at 81.534,193.675 h1.27 r180
DDS6_P3: Top Overlay "2" at 80.518,187.452 h1.27; Top Overlay "1" at 81.026,184.912 h1.27; Top Overlay "7" at 92.202,184.912 h1.27; Top Overlay "8" at 92.202,187.452 h1.27
DDS6_U4: Top Overlay "*" at 56.256,186.293 h1.88 r90; Mechanical 1 "*" at 56.255,186.291 h1.88 r90
J1: Mechanical 3 "board edge" at 100.927,104.274 h0.2 r90